# EAGLE board multiple4 (EAGLE 5.09), part 1 of 2
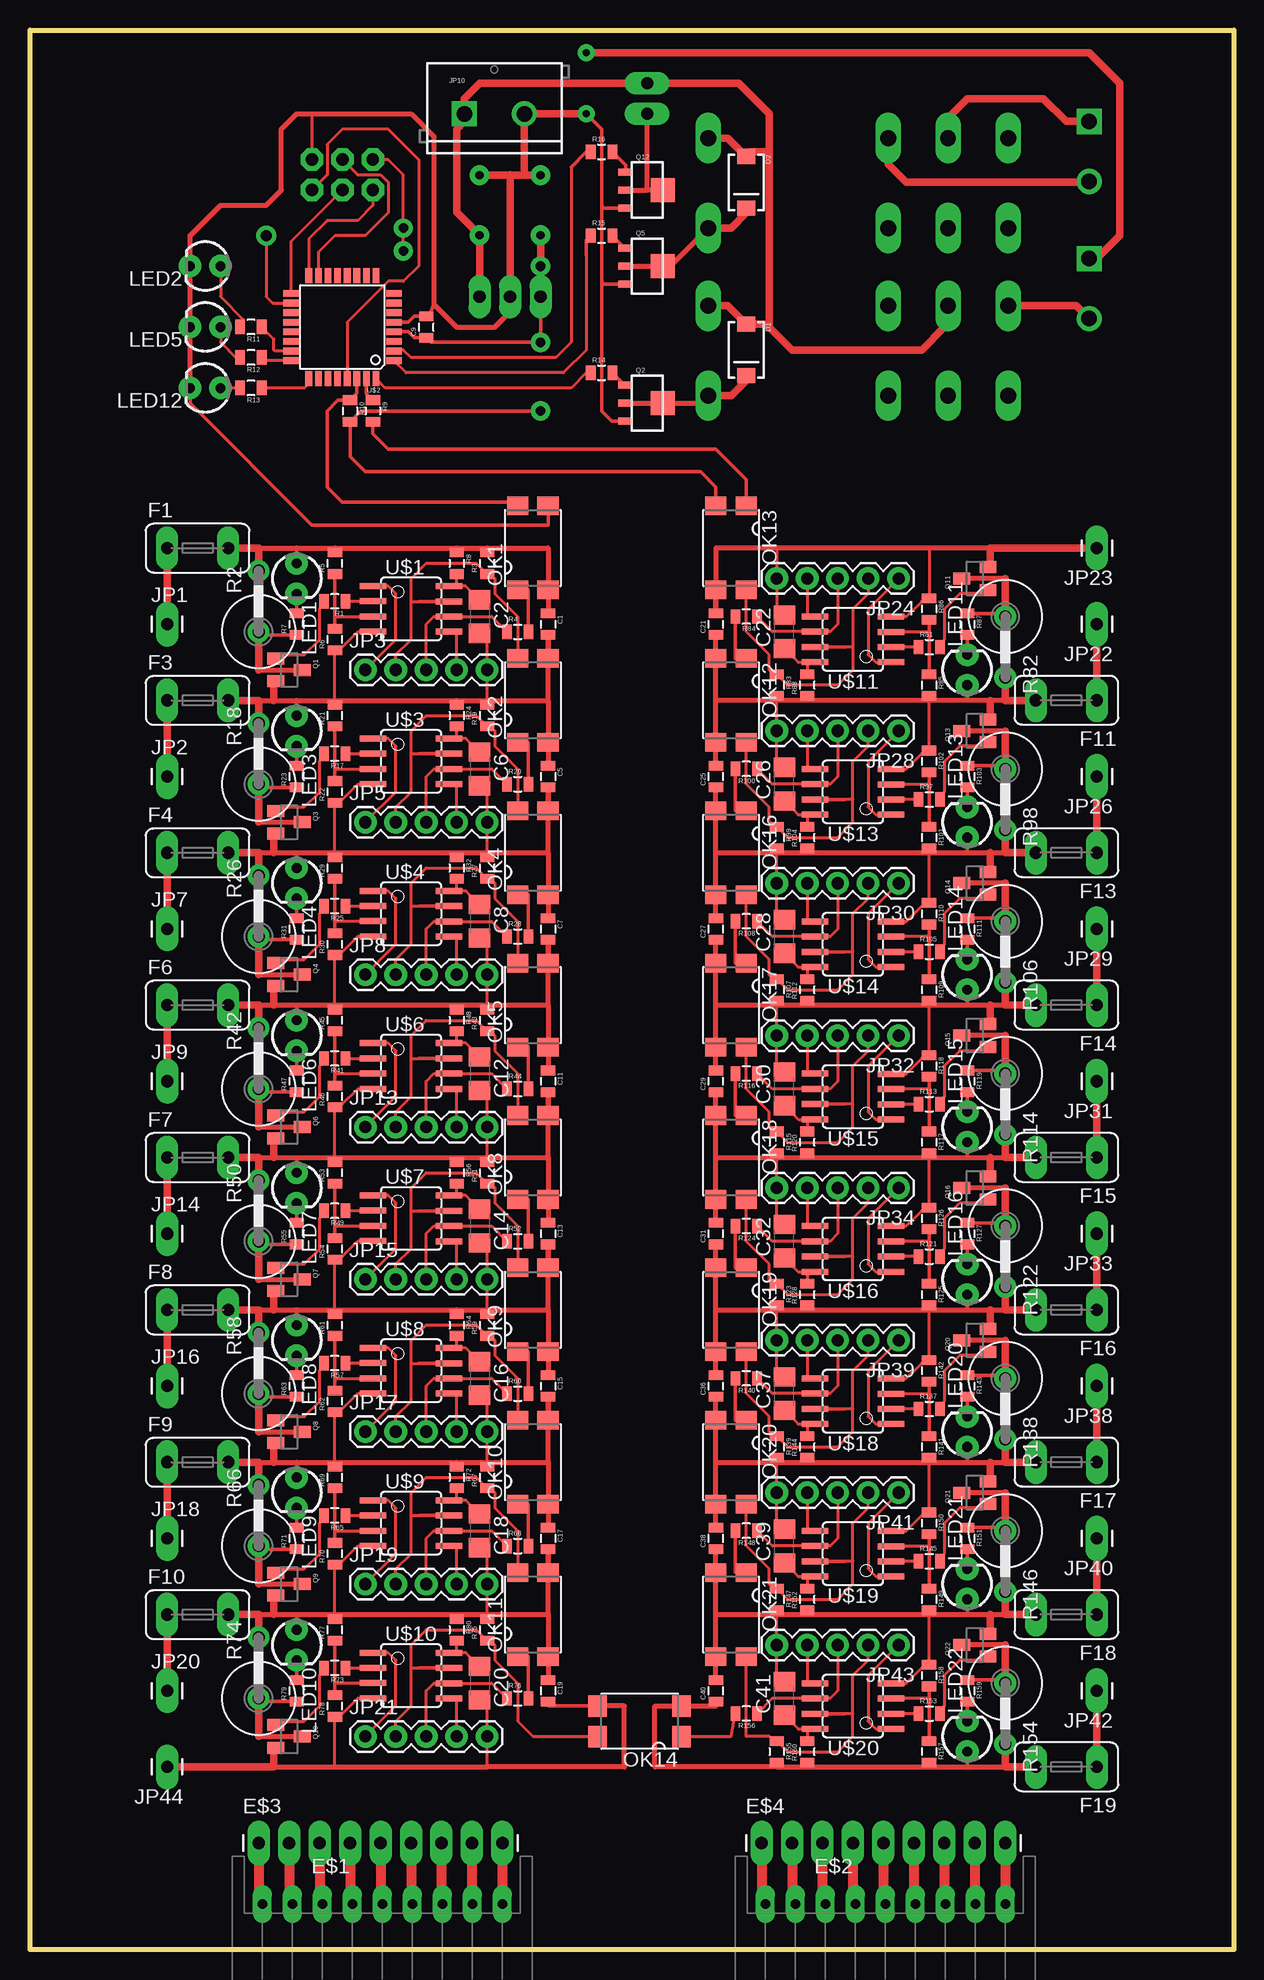
[diagram p0: board, top side]
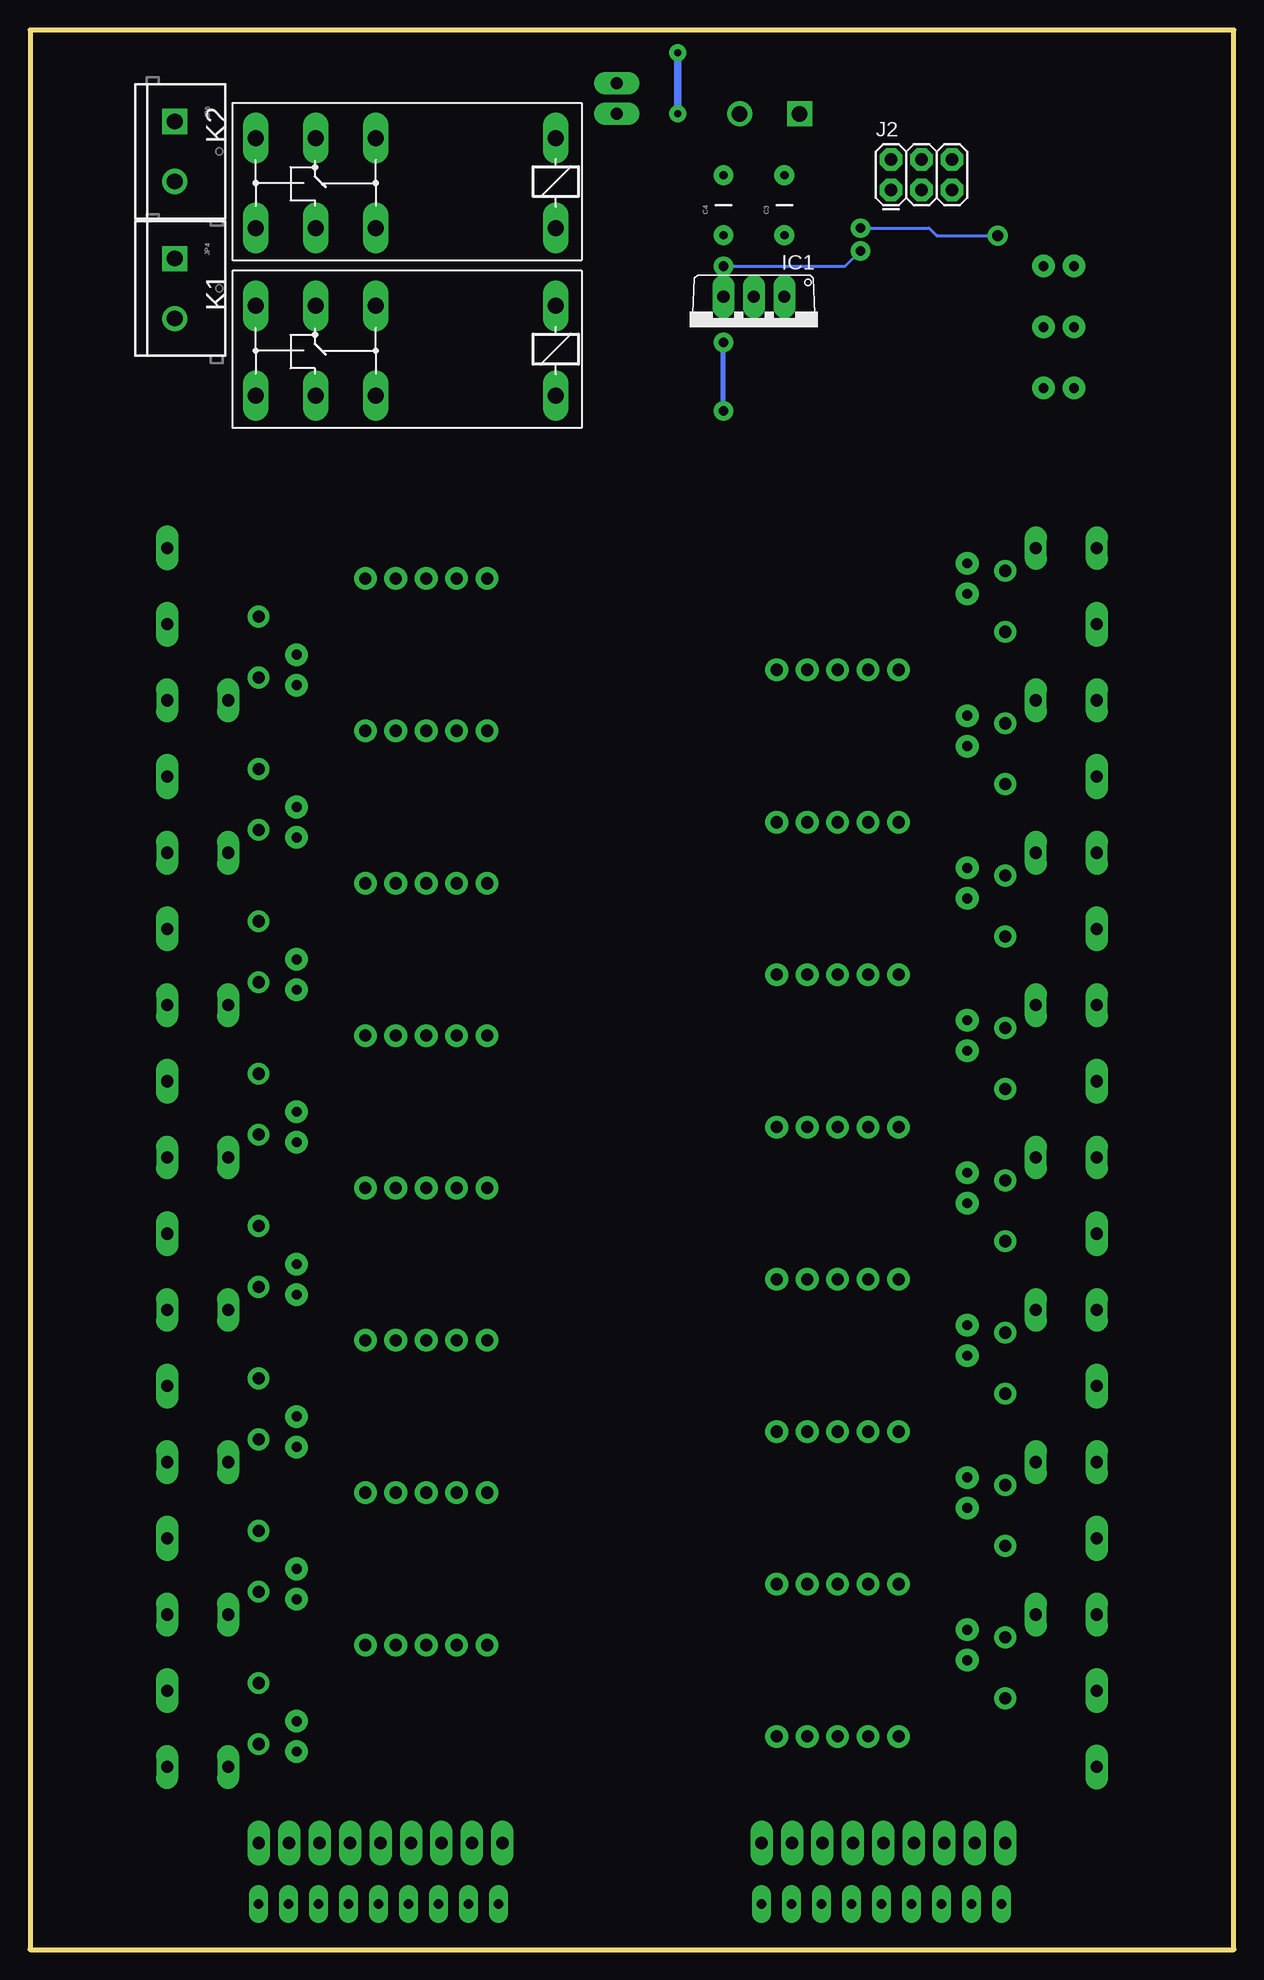
[diagram p1: board, bottom side, seen from below]

Size 100.33 x 160.02 mm. Coordinates in mm from the lower left corner, seen from the top.
Outline: 0,0 0,160.02 100.33,160.02 100.33,0 0,0
Copper layers (1*16): Top 0.035mm / dielectric 1.5mm / Bottom 0.035mm
Design rules "kng *": minimum track width 0.25mm, minimum drill 0.8mm, track to track 0.2mm, track to pad 0.2mm, pad to pad 0.2mm, via to via 0.2mm, smd to smd 0.2mm, copper to edge 1mm, drill to drill 0.2mm, minimum pad ring 0.4mm, minimum via ring 0.4mm, stop-mask expansion 0.15mm, vias tented up to drill 0mil, thermal gap 0.25mm

## Footprints (pad centres in the part's own frame; a part is rotated, then mirrored left to right if it is on the bottom)
0805 = smd 0.8 x 1.2: 1 -0.9,0; 2 0.9,0
C1206 = smd 1.6 x 1.8: 1 -1.4,0; 2 1.4,0
CAP-PTH-5MM = drill 0.7 pad 1.651 round: 1 -2.5,0; 2 2.5,0
SMA-DIODE = smd 1.27 x 1.47: A -2.15,0; C 2.15,0
JST-XHP-9 = drill 0.8 long: 1 0,0; 2 0,2.5; 3 0,5; 4 0,7.5; 5 0,10; 6 0,12.5; 7 0,15; 8 0,17.5; 9 0,20
1X09_LONGPADS = drill 1.016 pad 1.88 long: 1 0,0; 2 2.54,0; 3 5.08,0; 4 7.62,0; 5 10.16,0; 6 12.7,0; 7 15.24,0; 8 17.78,0; 9 20.32,0
TE5 = drill 1.016 long: 1 -2.54,0; 2 2.54,0
TO220V = drill 1.016 long: 1 -2.54,-2.54; 2 0,-2.54; 3 2.54,-2.54
1X02_LONGPADS = drill 1.016 pad 1.88 long: 1 0,0; 2 2.54,0
2X3 = drill 1.016 pad 1.88 octagon: 1 0,0; 2 0,2.54; 3 2.54,0; 4 2.54,2.54; 5 5.08,0; 6 5.08,2.54
1X01_LONGPAD = drill 1.016 pad 1.88 long: 1 0,0
1X05 = drill 1.016 pad 1.88 round: 1 0,0; 2 2.54,0; 3 5.08,0; 4 7.62,0; 5 10.16,0
SCREWTERMINAL-5MM-2 = drill 1.3 pad 2.032 square: 1 0,0 | drill 1.3 pad 2.032 round: 2 5,0
G2RE = drill 1.321 long: 1 -2.54,-3.683; 2 -2.54,3.81; O0 12.471,-3.683; O1 12.471,3.81; P0 17.45,-3.683; P1 17.45,3.81; S0 22.454,-3.683; S1 22.454,3.81
LED3MM = drill 0.813 pad 1.88 round: A -1.27,0; K 1.27,0
SMD4 = smd 1.78 x 1.55: 1 -1.27,-3.5; 2 1.27,-3.5; 3 1.27,3.5; 4 -1.27,3.5
SOT23 = smd 1 x 1.4: 1 -0.95,-1.1; 2 0.95,-1.1; 3 0,1.1
SOT89 = smd 0.58 x 1.2: 1 -1.5,-1.8; 2 0,-1.8; 3 1.5,-1.8 | smd 2 x 2: 4 0,1.3
0617V = drill 1.016 round: 1 -2.54,0; 2 2.54,0
SOIC8 = smd 0.5 x 2.2: 1 -1.905,-3.154; 2 -0.645,-3.154; 3 0.625,-3.154; 4 1.895,-3.154; 5 1.905,3.154; 6 0.635,3.154; 7 -0.635,3.154; 8 -1.905,3.154
TQFP32-08 = smd 1.27 x 0.559: 1 -4.293,2.8; 2 -4.293,2; 3 -4.293,1.2; 4 -4.293,0.4; 5 -4.293,-0.4; 6 -4.293,-1.2; 7 -4.293,-2; 8 -4.293,-2.8; 17 4.293,-2.8; 18 4.293,-2; 19 4.293,-1.2; 20 4.293,-0.4; 21 4.293,0.4; 22 4.293,1.2; 23 4.293,2; 24 4.293,2.8 | smd 0.559 x 1.27: 9 -2.8,-4.293; 10 -2,-4.293; 11 -1.2,-4.293; 12 -0.4,-4.293; 13 0.4,-4.293; 14 1.2,-4.293; 15 2,-4.293; 16 2.8,-4.293; 25 2.8,4.293; 26 2,4.293; 27 1.2,4.293; 28 0.4,4.293; 29 -0.4,4.293; 30 -1.2,4.293; 31 -2,4.293; 32 -2.8,4.293

## Placement (x,y rotation side)
C1  100n  [0805]  43.18,110.49 270 top
C2  1u  [C1206]  37.47,111.12 270 top
C3  1u  [CAP-PTH-5MM]  37.47,145.41 90 bottom
C4  1u  [CAP-PTH-5MM]  42.55,145.41 90 bottom
C5  100n  [0805]  43.18,97.79 270 top
C6  1u  [C1206]  37.47,98.42 270 top
C7  100n  [0805]  43.18,85.09 270 top
C8  1u  [C1206]  37.47,85.72 270 top
C9  100n  [0805]  33.02,135.25 90 top
C11  100n  [0805]  43.18,72.39 270 top
C12  1u  [C1206]  37.47,73.03 270 top
C13  100n  [0805]  43.18,59.69 270 top
C14  1u  [C1206]  37.47,60.33 270 top
C15  100n  [0805]  43.18,46.99 270 top
C16  1u  [C1206]  37.47,47.62 270 top
C17  100n  [0805]  43.18,34.29 270 top
C18  1u  [C1206]  37.47,34.92 270 top
C19  100n  [0805]  43.18,21.59 270 top
C20  1u  [C1206]  37.47,22.23 270 top
C21  100n  [0805]  57.15,110.49 90 top
C22  1u  [C1206]  62.87,109.86 90 top
C25  100n  [0805]  57.15,97.79 90 top
C26  1u  [C1206]  62.87,97.16 90 top
C27  100n  [0805]  57.15,85.09 90 top
C28  1u  [C1206]  62.87,84.45 90 top
C29  100n  [0805]  57.15,72.39 90 top
C30  1u  [C1206]  62.87,71.75 90 top
C31  100n  [0805]  57.15,59.69 90 top
C32  1u  [C1206]  62.87,59.05 90 top
C36  100n  [0805]  57.15,46.99 90 top
C37  1u  [C1206]  62.87,46.35 90 top
C38  100n  [0805]  57.15,34.29 90 top
C39  1u  [C1206]  62.87,33.66 90 top
C40  100n  [0805]  57.15,21.59 90 top
C41  1u  [C1206]  62.87,20.95 90 top
D1  1N4004  [SMA-DIODE]  59.69,133.35 270 top
D2  1N4004  [SMA-DIODE]  59.69,147.32 270 top
E$1  [JST-XHP-9]  39.37,3.81 90 top
E$2  [JST-XHP-9]  81.28,3.81 90 top
E$3  [1X09_LONGPADS]  19.05,8.89 0 top
E$4  [1X09_LONGPADS]  60.96,8.89 0 top
F1  [TE5]  13.97,116.84 0 top
F3  [TE5]  13.97,104.14 0 top
F4  [TE5]  13.97,91.44 0 top
F6  [TE5]  13.97,78.74 0 top
F7  [TE5]  13.97,66.04 0 top
F8  [TE5]  13.97,53.34 0 top
F9  [TE5]  13.97,40.64 0 top
F10  [TE5]  13.97,27.94 0 top
F11  [TE5]  86.36,104.14 180 top
F13  [TE5]  86.36,91.44 180 top
F14  [TE5]  86.36,78.74 180 top
F15  [TE5]  86.36,66.04 180 top
F16  [TE5]  86.36,53.34 180 top
F17  [TE5]  86.36,40.64 180 top
F18  [TE5]  86.36,27.94 180 top
F19  [TE5]  86.36,15.24 180 top
IC1  7805TV  [TO220V]  40.01,135.25 180 bottom
J1  TX  [1X02_LONGPADS]  51.44,155.57 270 top
J2  AVR_SPI_PRG_6PTH  [2X3]  28.57,146.69 0 bottom
JP1  M01PTH_LONGPAD  [1X01_LONGPAD]  11.43,110.49 0 top
JP2  M01PTH_LONGPAD  [1X01_LONGPAD]  11.43,97.79 0 top
JP3  ICSP  [1X05]  27.94,106.68 0 top
JP4  R1  [SCREWTERMINAL-5MM-2]  88.27,140.97 270 bottom
JP5  ICSP  [1X05]  27.94,93.98 0 top
JP6  R2  [SCREWTERMINAL-5MM-2]  88.27,152.4 270 bottom
JP7  M01PTH_LONGPAD  [1X01_LONGPAD]  11.43,85.09 0 top
JP8  ICSP  [1X05]  27.94,81.28 0 top
JP9  M01PTH_LONGPAD  [1X01_LONGPAD]  11.43,72.39 0 top
JP10  12V  [SCREWTERMINAL-5MM-2]  36.2,153.03 0 top
JP13  ICSP  [1X05]  27.94,68.58 0 top
JP14  M01PTH_LONGPAD  [1X01_LONGPAD]  11.43,59.69 0 top
JP15  ICSP  [1X05]  27.94,55.88 0 top
JP16  M01PTH_LONGPAD  [1X01_LONGPAD]  11.43,46.99 0 top
JP17  ICSP  [1X05]  27.94,43.18 0 top
JP18  M01PTH_LONGPAD  [1X01_LONGPAD]  11.43,34.29 0 top
JP19  ICSP  [1X05]  27.94,30.48 0 top
JP20  M01PTH_LONGPAD  [1X01_LONGPAD]  11.43,21.59 0 top
JP21  ICSP  [1X05]  27.94,17.78 0 top
JP22  M01PTH_LONGPAD  [1X01_LONGPAD]  88.9,110.49 180 top
JP23  M01PTH_LONGPAD  [1X01_LONGPAD]  88.9,116.84 180 top
JP24  ICSP  [1X05]  72.39,114.3 180 top
JP26  M01PTH_LONGPAD  [1X01_LONGPAD]  88.9,97.79 180 top
JP28  ICSP  [1X05]  72.39,101.6 180 top
JP29  M01PTH_LONGPAD  [1X01_LONGPAD]  88.9,85.09 180 top
JP30  ICSP  [1X05]  72.39,88.9 180 top
JP31  M01PTH_LONGPAD  [1X01_LONGPAD]  88.9,72.39 180 top
JP32  ICSP  [1X05]  72.39,76.2 180 top
JP33  M01PTH_LONGPAD  [1X01_LONGPAD]  88.9,59.69 180 top
JP34  ICSP  [1X05]  72.39,63.5 180 top
JP38  M01PTH_LONGPAD  [1X01_LONGPAD]  88.9,46.99 180 top
JP39  ICSP  [1X05]  72.39,50.8 180 top
JP40  M01PTH_LONGPAD  [1X01_LONGPAD]  88.9,34.29 180 top
JP41  ICSP  [1X05]  72.39,38.1 180 top
JP42  M01PTH_LONGPAD  [1X01_LONGPAD]  88.9,21.59 180 top
JP43  ICSP  [1X05]  72.39,25.4 180 top
JP44  M01PTH_LONGPAD  [1X01_LONGPAD]  11.43,15.24 180 top
K1  G2RE  [G2RE]  59.05,133.35 180 bottom
K2  G2RE  [G2RE]  59.05,147.32 180 bottom
LED1  YELLOW  [LED3MM]  22.23,114.3 270 top
LED2  GREEN  [LED3MM]  14.61,140.34 180 top
LED3  YELLOW  [LED3MM]  22.23,101.6 270 top
LED4  YELLOW  [LED3MM]  22.23,88.9 270 top
LED5  YELLOW  [LED3MM]  14.61,135.25 180 top
LED6  YELLOW  [LED3MM]  22.23,76.2 270 top
LED7  YELLOW  [LED3MM]  22.23,63.5 270 top
LED8  YELLOW  [LED3MM]  22.23,50.8 270 top
LED9  YELLOW  [LED3MM]  22.23,38.1 270 top
LED10  YELLOW  [LED3MM]  22.23,25.4 270 top
LED11  YELLOW  [LED3MM]  78.11,106.68 90 top
LED12  RED  [LED3MM]  14.61,130.18 180 top
LED13  YELLOW  [LED3MM]  78.11,93.98 90 top
LED14  YELLOW  [LED3MM]  78.11,81.28 90 top
LED15  YELLOW  [LED3MM]  78.11,68.58 90 top
LED16  YELLOW  [LED3MM]  78.11,55.88 90 top
LED20  YELLOW  [LED3MM]  78.11,43.18 90 top
LED21  YELLOW  [LED3MM]  78.11,30.48 90 top
LED22  YELLOW  [LED3MM]  78.11,17.78 90 top
OK1  3E-P120  [SMD4]  41.91,116.84 0 top
OK2  3E-P120  [SMD4]  41.91,104.14 0 top
OK4  3E-P120  [SMD4]  41.91,91.44 0 top
OK5  3E-P120  [SMD4]  41.91,78.74 0 top
OK8  3E-P120  [SMD4]  41.91,66.04 0 top
OK9  3E-P120  [SMD4]  41.91,53.34 0 top
OK10  3E-P120  [SMD4]  41.91,40.64 0 top
OK11  3E-P120  [SMD4]  41.91,27.94 0 top
OK12  3E-P120  [SMD4]  58.42,104.14 180 top
OK13  3E-P120  [SMD4]  58.42,116.84 180 top
OK14  3E-P120  [SMD4]  50.8,19.05 90 top
OK16  3E-P120  [SMD4]  58.42,91.44 180 top
OK17  3E-P120  [SMD4]  58.42,78.74 180 top
OK18  3E-P120  [SMD4]  58.42,66.04 180 top
OK19  3E-P120  [SMD4]  58.42,53.34 180 top
OK20  3E-P120  [SMD4]  58.42,40.64 180 top
OK21  3E-P120  [SMD4]  58.42,27.94 180 top
Q1  PMF290XN  [SOT23]  21.59,106.68 270 top
Q2  2SK3980  [SOT89]  51.44,128.91 270 top
Q3  PMF290XN  [SOT23]  21.59,93.98 270 top
Q4  PMF290XN  [SOT23]  21.59,81.28 270 top
Q5  2SK3980  [SOT89]  51.44,140.34 270 top
Q6  PMF290XN  [SOT23]  21.59,68.58 270 top
Q7  PMF290XN  [SOT23]  21.59,55.88 270 top
Q8  PMF290XN  [SOT23]  21.59,43.18 270 top
Q9  PMF290XN  [SOT23]  21.59,30.48 270 top
Q10  PMF290XN  [SOT23]  21.59,17.78 270 top
Q11  PMF290XN  [SOT23]  78.74,114.3 90 top
Q12  2SK3980  [SOT89]  51.44,146.69 270 top
Q13  PMF290XN  [SOT23]  78.74,101.6 90 top
Q14  PMF290XN  [SOT23]  78.74,88.9 90 top
Q15  PMF290XN  [SOT23]  78.74,76.2 90 top
Q16  PMF290XN  [SOT23]  78.74,63.5 90 top
Q20  PMF290XN  [SOT23]  78.74,50.8 90 top
Q21  PMF290XN  [SOT23]  78.74,38.1 90 top
Q22  PMF290XN  [SOT23]  78.74,25.4 90 top
R1  100  [0805]  25.4,112.39 180 top
R2  5.6  [0617V]  19.05,112.39 90 top
R3  470  [0805]  38.1,115.57 90 top
R4  330  [0805]  40.64,109.86 0 top
R5  33k  [0805]  25.4,115.57 90 top
R6  10k  [0805]  25.4,109.22 90 top
R7  270  [0805]  22.23,110.49 90 top
R8  100  [0805]  35.56,115.57 270 top
R9  470  [0805]  28.57,128.27 270 top
R10  1k  [0805]  26.67,128.27 270 top
R11  330  [0805]  18.41,135.25 180 top
R12  330  [0805]  18.41,132.72 180 top
R13  330  [0805]  18.41,130.18 180 top
R14  100  [0805]  47.62,131.44 0 top
R15  100  [0805]  47.62,142.88 0 top
R16  100  [0805]  47.62,149.86 0 top
R17  100  [0805]  25.4,99.69 180 top
R18  5.6  [0617V]  19.05,99.69 90 top
R19  470  [0805]  38.1,102.87 90 top
R20  330  [0805]  40.64,97.16 0 top
R21  33k  [0805]  25.4,102.87 90 top
R22  10k  [0805]  25.4,96.52 90 top
R23  270  [0805]  22.23,97.79 90 top
R24  100  [0805]  35.56,102.87 270 top
R25  100  [0805]  25.4,87 180 top
R26  5.6  [0617V]  19.05,87 90 top
R27  470  [0805]  38.1,90.17 90 top
R28  330  [0805]  40.64,84.45 0 top
R29  33k  [0805]  25.4,90.17 90 top
R30  10k  [0805]  25.4,83.82 90 top
R31  270  [0805]  22.23,85.09 90 top
R32  100  [0805]  35.56,90.17 270 top
R41  100  [0805]  25.4,74.3 180 top
R42  5.6  [0617V]  19.05,74.3 90 top
R43  470  [0805]  38.1,77.47 90 top
R44  330  [0805]  40.64,71.75 0 top
R45  33k  [0805]  25.4,77.47 90 top
R46  10k  [0805]  25.4,71.12 90 top
R47  270  [0805]  22.23,72.39 90 top
R48  100  [0805]  35.56,77.47 270 top
R49  100  [0805]  25.4,61.59 180 top
R50  5.6  [0617V]  19.05,61.59 90 top
R51  470  [0805]  38.1,64.77 90 top
R52  330  [0805]  40.64,59.05 0 top
R53  33k  [0805]  25.4,64.77 90 top
R54  10k  [0805]  25.4,58.42 90 top
R55  270  [0805]  22.23,59.69 90 top
R56  100  [0805]  35.56,64.77 270 top
R57  100  [0805]  25.4,48.9 180 top
R58  5.6  [0617V]  19.05,48.9 90 top
R59  470  [0805]  38.1,52.07 90 top
R60  330  [0805]  40.64,46.35 0 top
R61  33k  [0805]  25.4,52.07 90 top
R62  10k  [0805]  25.4,45.72 90 top
R63  270  [0805]  22.23,46.99 90 top
R64  100  [0805]  35.56,52.07 270 top
R65  100  [0805]  25.4,36.2 180 top
R66  5.6  [0617V]  19.05,36.2 90 top
R67  470  [0805]  38.1,39.37 90 top
R68  330  [0805]  40.64,33.66 0 top
R69  33k  [0805]  25.4,39.37 90 top
R70  10k  [0805]  25.4,33.02 90 top
R71  270  [0805]  22.23,34.29 90 top
R72  100  [0805]  35.56,39.37 270 top
R73  100  [0805]  25.4,23.5 180 top
R74  5.6  [0617V]  19.05,23.5 90 top
R75  470  [0805]  38.1,26.67 90 top
R76  330  [0805]  40.64,20.95 0 top
R77  33k  [0805]  25.4,26.67 90 top
R78  10k  [0805]  25.4,20.32 90 top
R79  270  [0805]  22.23,21.59 90 top
R80  100  [0805]  35.56,26.67 270 top
R81  100  [0805]  74.93,108.58 0 top
R82  5.6  [0617V]  81.28,108.58 270 top
R83  470  [0805]  62.23,105.41 270 top
R84  330  [0805]  59.69,111.12 180 top
R85  33k  [0805]  74.93,105.41 270 top
R86  10k  [0805]  74.93,111.76 270 top
R87  270  [0805]  78.11,110.49 270 top
R88  100  [0805]  64.77,105.41 90 top
R97  100  [0805]  74.93,95.89 0 top
R98  5.6  [0617V]  81.28,95.89 270 top
R99  470  [0805]  62.23,92.71 270 top
R100  330  [0805]  59.69,98.42 180 top
R101  33k  [0805]  74.93,92.71 270 top
R102  10k  [0805]  74.93,99.06 270 top
R103  270  [0805]  78.11,97.79 270 top
R104  100  [0805]  64.77,92.71 90 top
R105  100  [0805]  74.93,83.19 0 top
R106  5.6  [0617V]  81.28,83.19 270 top
R107  470  [0805]  62.23,80.01 270 top
R108  330  [0805]  59.69,85.72 180 top
R109  33k  [0805]  74.93,80.01 270 top
R110  10k  [0805]  74.93,86.36 270 top
R111  270  [0805]  78.11,85.09 270 top
R112  100  [0805]  64.77,80.01 90 top
R113  100  [0805]  74.93,70.48 0 top
R114  5.6  [0617V]  81.28,70.48 270 top
R115  470  [0805]  62.23,67.31 270 top
R116  330  [0805]  59.69,73.03 180 top
R117  33k  [0805]  74.93,67.31 270 top
R118  10k  [0805]  74.93,73.66 270 top
R119  270  [0805]  78.11,72.39 270 top
R120  100  [0805]  64.77,67.31 90 top
R121  100  [0805]  74.93,57.78 0 top
R122  5.6  [0617V]  81.28,57.78 270 top
R123  470  [0805]  62.23,54.61 270 top
R124  330  [0805]  59.69,60.33 180 top
R125  33k  [0805]  74.93,54.61 270 top
R126  10k  [0805]  74.93,60.96 270 top
R127  270  [0805]  78.11,59.69 270 top
R128  100  [0805]  64.77,54.61 90 top
R137  100  [0805]  74.93,45.09 0 top
R138  5.6  [0617V]  81.28,45.09 270 top
R139  470  [0805]  62.23,41.91 270 top
R140  330  [0805]  59.69,47.62 180 top
R141  33k  [0805]  74.93,41.91 270 top
R142  10k  [0805]  74.93,48.26 270 top
R143  270  [0805]  78.11,46.99 270 top
R144  100  [0805]  64.77,41.91 90 top
R145  100  [0805]  74.93,32.38 0 top
R146  5.6  [0617V]  81.28,32.38 270 top
R147  470  [0805]  62.23,29.21 270 top
R148  330  [0805]  59.69,34.92 180 top
R149  33k  [0805]  74.93,29.21 270 top
R150  10k  [0805]  74.93,35.56 270 top
R151  270  [0805]  78.11,34.29 270 top
R152  100  [0805]  64.77,29.21 90 top
R153  100  [0805]  74.93,19.68 0 top
R154  5.6  [0617V]  81.28,19.68 270 top
R155  470  [0805]  62.23,16.51 270 top
R156  330  [0805]  59.69,19.68 180 top
R157  33k  [0805]  74.93,16.51 270 top
R158  10k  [0805]  74.93,22.86 270 top
R159  270  [0805]  78.11,21.59 270 top
R160  100  [0805]  64.77,16.51 90 top
U$1  TINY25/45/85-20SU  [SOIC8]  31.75,111.76 270 top
U$2  AVR-MEGA8-AI  [TQFP32-08]  26.04,135.25 180 top
U$3  TINY25/45/85-20SU  [SOIC8]  31.75,99.06 270 top
U$4  TINY25/45/85-20SU  [SOIC8]  31.75,86.36 270 top
U$6  TINY25/45/85-20SU  [SOIC8]  31.75,73.66 270 top
U$7  TINY25/45/85-20SU  [SOIC8]  31.75,60.96 270 top
U$8  TINY25/45/85-20SU  [SOIC8]  31.75,48.26 270 top
U$9  TINY25/45/85-20SU  [SOIC8]  31.75,35.56 270 top
U$10  TINY25/45/85-20SU  [SOIC8]  31.75,22.86 270 top
U$11  TINY25/45/85-20SU  [SOIC8]  68.58,109.22 90 top
U$13  TINY25/45/85-20SU  [SOIC8]  68.58,96.52 90 top
U$14  TINY25/45/85-20SU  [SOIC8]  68.58,83.82 90 top
U$15  TINY25/45/85-20SU  [SOIC8]  68.58,71.12 90 top
U$16  TINY25/45/85-20SU  [SOIC8]  68.58,58.42 90 top
U$18  TINY25/45/85-20SU  [SOIC8]  68.58,45.72 90 top
U$19  TINY25/45/85-20SU  [SOIC8]  68.58,33.02 90 top
U$20  TINY25/45/85-20SU  [SOIC8]  68.58,20.32 90 top

## Library data of the parts
C1 C3-C5 C7 C9 C11 C13 C15 C17 C19 C21 C25 C27 C29 C31 C36 C38 C40 D1 D2 J1 J2 JP1-JP10 JP13-JP24 JP26 JP28-JP34 JP38-JP44 LED1-LED16 LED20-LED22 R1 R3-R17 R19-R25 R27-R32 R41 R43-R49 R51-R57 R59-R65 R67-R73 R75-R81 R83-R88 R97 R99-R105 R107-R113 R115-R121 R123-R128 R137 R139-R145 R147-R153 R155-R160 U$2 = SparkFun
C2 C6 C8 C12 C14 C16 C18 C20 C22 C26 C28 C30 C32 C37 C39 C41 R2 R18 R26 R42 R50 R58 R66 R74 R82 R98 R106 R114 R122 R138 R146 R154 = resistor
E$1-E$4 OK1 OK2 OK4 OK5 OK8-OK14 OK16-OK21 Q1-Q16 Q20-Q22 = kng
F1 F3 F4 F6-F11 F13-F19 = fuse
IC1 = linear
K1 K2 = relay
U$1 U$3 U$4 U$6-U$11 U$13-U$16 U$18-U$20 = avr-6

## Nets
3.3V: C4.1 C9.1 IC1.3 J2.2 R10.2 U$2.4 U$2.18
5V: C3.1 D1.A D2.A IC1.1 J1.1 JP10.1 K1.1 K1.P0 K2.1
GND1: C1.2
GND2: C3.2 C4.2 C9.2 IC1.2 J2.6 JP4.1 JP10.2 LED2.K LED5.K LED12.K Q2.3 Q5.3 Q12.3 U$2.5
GND3: R22.1 U$3.4
GND4: R30.1 U$4.4
GND6: R46.1 U$6.4
GND7: R54.1 U$7.4
GND8: R62.1 U$8.4
GND9: R70.1 U$9.4
GND10: R78.1 U$10.4
GND11: C21.2 C22.2 JP23.1 JP24.5 OK13.3 Q11.2 R86.1 U$11.4
GND13: R102.1 U$13.4
GND14: R110.1 U$14.4
GND15: R118.1 U$15.4
GND16: R126.1 U$16.4
GND17: R142.1 U$18.4
GND18: R150.1 U$19.4
GND19: R158.1 U$20.4
N$1: Q1.1 R1.2
N$2: Q1.3 R2.1 R7.1
N$3: JP3.3 R4.1 U$1.6
N$4: JP3.4 U$1.5
N$5: JP3.1 U$1.1
N$6: R1.1 U$1.2
N$7: R5.1 R6.2 U$1.3
N$8: JP3.2 R3.1 U$1.7
N$9: OK1.1 R4.2
N$10: LED1.K R7.2
N$11: C2.1 R8.2 U$1.8
N$12: F1.1 JP1.1
N$13: J2.5 U$2.29
N$14: J2.3 U$2.17
N$15: J2.1 U$2.16
N$16: J2.4 U$2.15
N$17: R9.1 U$2.31
N$18: R9.2
N$19: R10.1 U$2.30
N$20: R11.1 U$2.23
N$21: R12.1 U$2.24
N$22: R13.1 U$2.25
N$23: R14.1 U$2.32
N$24: R15.1 U$2.1
N$25: Q3.1 R17.2
N$26: Q3.3 R18.1 R23.1
N$27: JP5.3 R20.1 U$3.6
N$28: JP5.4 U$3.5
N$29: JP5.1 U$3.1
N$30: R17.1 U$3.2
N$31: R21.1 R22.2 U$3.3
N$32: JP5.2 R19.1 U$3.7
N$33: OK2.1 R20.2
N$34: LED3.K R23.2
N$35: C6.1 R24.2 U$3.8
N$36: F3.1 JP2.1
N$37: Q4.1 R25.2
N$38: Q4.3 R26.1 R31.1
N$39: JP8.3 R28.1 U$4.6
N$40: JP8.4 U$4.5
N$41: JP8.1 U$4.1
N$42: R25.1 U$4.2
N$43: R29.1 R30.2 U$4.3
N$44: JP8.2 R27.1 U$4.7
N$45: OK4.1 R28.2
N$46: LED4.K R31.2
N$47: C8.1 R32.2 U$4.8
N$48: F4.1 JP7.1
N$49: R16.1 U$2.2
N$50: LED12.A R13.2
N$51: LED5.A R12.2
N$52: LED2.A R11.2
N$53: Q2.1 R14.2
N$54: Q5.1 R15.2
N$55: Q12.1 R16.2
N$56: J1.2 Q12.2
N$57: D2.C K2.2 Q5.2
N$58: D1.C K1.2 Q2.2
N$59: JP4.2 K1.S0
N$60: JP6.1 K2.P0
N$61: Q6.1 R41.2
N$62: Q6.3 R42.1 R47.1
N$63: JP13.3 R44.1 U$6.6
N$64: JP13.4 U$6.5
N$65: JP13.1 U$6.1
N$66: R41.1 U$6.2
N$67: R45.1 R46.2 U$6.3
N$68: JP13.2 R43.1 U$6.7
N$69: OK5.1 R44.2
N$70: LED6.K R47.2
N$71: C12.1 R48.2 U$6.8
N$72: F6.1 JP9.1
N$73: Q7.1 R49.2
N$74: Q7.3 R50.1 R55.1
N$75: JP15.3 R52.1 U$7.6
N$76: JP15.4 U$7.5
N$77: JP15.1 U$7.1
N$78: R49.1 U$7.2
N$79: R53.1 R54.2 U$7.3
N$80: JP15.2 R51.1 U$7.7
N$81: OK8.1 R52.2
N$82: LED7.K R55.2
N$83: C14.1 R56.2 U$7.8
N$84: F7.1 JP14.1
N$85: Q8.1 R57.2
N$86: Q8.3 R58.1 R63.1
N$87: JP17.3 R60.1 U$8.6
N$88: JP17.4 U$8.5
N$89: JP17.1 U$8.1
N$90: R57.1 U$8.2
N$91: R61.1 R62.2 U$8.3
N$92: JP17.2 R59.1 U$8.7
N$93: OK9.1 R60.2
N$94: LED8.K R63.2
N$95: C16.1 R64.2 U$8.8
N$96: F8.1 JP16.1
N$97: Q9.1 R65.2
N$98: Q9.3 R66.1 R71.1
N$99: JP19.3 R68.1 U$9.6
N$100: JP19.4 U$9.5
N$101: JP19.1 U$9.1
N$102: R65.1 U$9.2
N$103: R69.1 R70.2 U$9.3
N$104: JP19.2 R67.1 U$9.7
N$105: OK10.1 R68.2
N$106: LED9.K R71.2
N$107: C18.1 R72.2 U$9.8
N$108: F9.1 JP18.1
N$109: Q10.1 R73.2
N$110: Q10.3 R74.1 R79.1
N$111: JP21.3 R76.1 U$10.6
N$112: JP21.4 U$10.5
N$113: JP21.1 U$10.1
N$114: R73.1 U$10.2
N$115: R77.1 R78.2 U$10.3
N$116: JP21.2 R75.1 U$10.7
N$117: OK11.1 R76.2
N$118: LED10.K R79.2
N$119: C20.1 R80.2 U$10.8
N$120: F10.1 JP20.1
N$121: Q11.1 R81.2
N$122: Q11.3 R82.1 R87.1
N$123: JP24.3 R84.1 U$11.6
N$124: JP24.4 U$11.5
N$125: JP24.1 U$11.1
N$126: R81.1 U$11.2
N$127: R85.1 R86.2 U$11.3
N$128: JP24.2 OK13.4 R83.1 U$11.7
N$129: OK12.1 R84.2
N$130: LED11.K R87.2
N$131: C22.1 R88.2 U$11.8
N$132: F11.1 JP22.1
N$133: JP6.2 K2.O0
N$145: Q13.1 R97.2
N$146: Q13.3 R98.1 R103.1
N$147: JP28.3 R100.1 U$13.6
N$148: JP28.4 U$13.5
N$149: JP28.1 U$13.1
N$150: R97.1 U$13.2
N$151: R101.1 R102.2 U$13.3
N$152: JP28.2 R99.1 U$13.7
N$153: OK16.1 R100.2
N$154: LED13.K R103.2
N$155: C26.1 R104.2 U$13.8
N$156: F13.1 JP26.1
N$157: Q14.1 R105.2
N$158: Q14.3 R106.1 R111.1
N$159: JP30.3 R108.1 U$14.6
N$160: JP30.4 U$14.5
N$161: JP30.1 U$14.1
N$162: R105.1 U$14.2
N$163: R109.1 R110.2 U$14.3
N$164: JP30.2 R107.1 U$14.7
N$165: OK17.1 R108.2
N$166: LED14.K R111.2
N$167: C28.1 R112.2 U$14.8
N$168: F14.1 JP29.1
N$169: Q15.1 R113.2
N$170: Q15.3 R114.1 R119.1
N$171: JP32.3 R116.1 U$15.6
N$172: JP32.4 U$15.5
N$173: JP32.1 U$15.1
N$174: R113.1 U$15.2
N$175: R117.1 R118.2 U$15.3
N$176: JP32.2 R115.1 U$15.7
N$182: OK18.1 R116.2
N$183: LED15.K R119.2
N$203: C30.1 R120.2 U$15.8
N$204: F15.1 JP31.1
N$205: Q16.1 R121.2
N$206: Q16.3 R122.1 R127.1
N$207: JP34.3 R124.1 U$16.6
N$208: JP34.4 U$16.5
N$209: JP34.1 U$16.1
N$210: R121.1 U$16.2
N$211: R125.1 R126.2 U$16.3
N$212: JP34.2 R123.1 U$16.7
N$213: OK19.1 R124.2
N$214: LED16.K R127.2
N$215: C32.1 R128.2 U$16.8
N$216: F16.1 JP33.1
N$217: Q20.1 R137.2
N$218: Q20.3 R138.1 R143.1
N$219: JP39.3 R140.1 U$18.6
N$220: JP39.4 U$18.5
N$221: JP39.1 U$18.1
N$222: R137.1 U$18.2
N$223: R141.1 R142.2 U$18.3
N$224: JP39.2 R139.1 U$18.7
N$225: OK20.1 R140.2
N$226: LED20.K R143.2
N$227: C37.1 R144.2 U$18.8
N$228: F17.1 JP38.1
N$229: Q21.1 R145.2
N$230: Q21.3 R146.1 R151.1
N$231: JP41.3 R148.1 U$19.6
N$232: JP41.4 U$19.5
N$233: JP41.1 U$19.1
N$234: R145.1 U$19.2
N$235: R149.1 R150.2 U$19.3
N$236: JP41.2 R147.1 U$19.7
N$237: OK21.1 R148.2
N$238: LED21.K R151.2
N$239: C39.1 R152.2 U$19.8
N$240: F18.1 JP40.1
N$241: Q22.1 R153.2
N$242: Q22.3 R154.1 R159.1
N$243: JP43.3 R156.1 U$20.6
N$244: JP43.4 U$20.5
N$245: JP43.1 U$20.1
N$246: R153.1 U$20.2
N$247: R157.1 R158.2 U$20.3
N$248: JP43.2 R155.1 U$20.7
N$249: R156.2
N$250: LED22.K R159.2
N$251: C41.1 R160.2 U$20.8
N$252: F19.1 JP42.1
S$2: E$3.1
S$4: E$3.2
S$5: E$3.3
S$6: E$3.4
S$7: E$3.5
S$8: E$3.6
S$9: E$3.7
S$10: E$3.8
S$11: E$1.1 E$3.9
S$12: E$4.1
S$13: E$4.2
S$14: E$4.3
S$15: E$4.4
S$17: E$4.6
S$18: E$4.7
S$19: E$4.8
S$20: E$2.1 E$4.9
S$32: C5.2
S$37: R6.1 U$1.4
S$38: Q1.2
S$39: C2.2 JP3.5
S$40: C6.2 JP5.5
S$41: Q3.2
S$42: C7.2
S$43: C8.2 JP8.5
S$44: Q4.2
S$45: C11.2
S$46: C12.2 JP13.5
S$47: Q6.2
S$48: C13.2
S$49: C14.2 JP15.5
S$50: Q7.2
S$51: C15.2
S$52: C16.2 JP17.5
S$53: Q8.2
S$54: C17.2
S$55: C18.2 JP19.5
S$56: Q9.2
S$59: C20.2 JP21.5 JP44.1 Q10.2
S$60: C25.2
S$64: C26.2 JP28.5
S$65: Q13.2
S$66: C27.2
S$67: C28.2 JP30.5
S$68: Q14.2
S$69: C29.2
S$70: C30.2 JP32.5
S$71: Q15.2
S$72: C31.2
S$73: C32.2 JP34.5
S$74: Q16.2
S$75: C36.2
S$76: C37.2 JP39.5
S$77: Q20.2
S$78: C38.2
S$79: C39.2 JP41.5
S$80: Q21.2
S$81: C40.2
S$82: C41.2 JP43.5
S$83: Q22.2
VCC1: C1.1 F1.2 LED1.A OK1.2 R2.2 R3.2 R5.2 R8.1
VCC3: C5.1 F3.2 LED3.A OK2.2 R18.2 R19.2 R21.2 R24.1
VCC4: C7.1 F4.2 LED4.A OK4.2 R26.2 R27.2 R29.2 R32.1
VCC5: C11.1 F6.2 LED6.A OK5.2 R42.2 R43.2 R45.2 R48.1
VCC6: C13.1 F7.2 LED7.A OK8.2 R50.2 R51.2 R53.2 R56.1
VCC7: C15.1 F8.2 LED8.A OK9.2 R58.2 R59.2 R61.2 R64.1
VCC8: C17.1 F9.2 LED9.A OK10.2 R66.2 R67.2 R69.2 R72.1
VCC9: C19.1 F10.2 LED10.A OK11.2 R74.2 R75.2 R77.2 R80.1
VCC10: F19.2 LED22.A OK14.2 R154.2 R155.2 R157.2 R160.1
VCC11: C21.1 F11.2 LED11.A OK12.2 R82.2 R83.2 R85.2 R88.1
VCC14: C25.1 F13.2 LED13.A OK16.2 R98.2 R99.2 R101.2 R104.1
VCC15: C27.1 F14.2 LED14.A OK17.2 R106.2 R107.2 R109.2 R112.1
VCC16: C29.1 F15.2 LED15.A OK18.2 R114.2 R115.2 R117.2 R120.1
VCC17: C31.1 F16.2 LED16.A OK19.2 R122.2 R123.2 R125.2 R128.1
VCC18: C36.1 F17.2 LED20.A OK20.2 R138.2 R139.2 R141.2 R144.1
VCC19: C38.1 F18.2 LED21.A OK21.2 R146.2 R147.2 R149.2 R152.1